# Altium PCB valvePCB.PcbDoc
Units mil, origin at the board's own origin, x right, y up, seen from the top; angles counter-clockwise.
Board outline 3900 x 2800 mil, 4 copper layers (Top Layer, Layer 1, Layer 2, Bottom Layer), stack 23.756 mil thick; 69 components, 43 nets, 241 pads, 132 vias.
Unrouted connection lines stored in the file: 44.
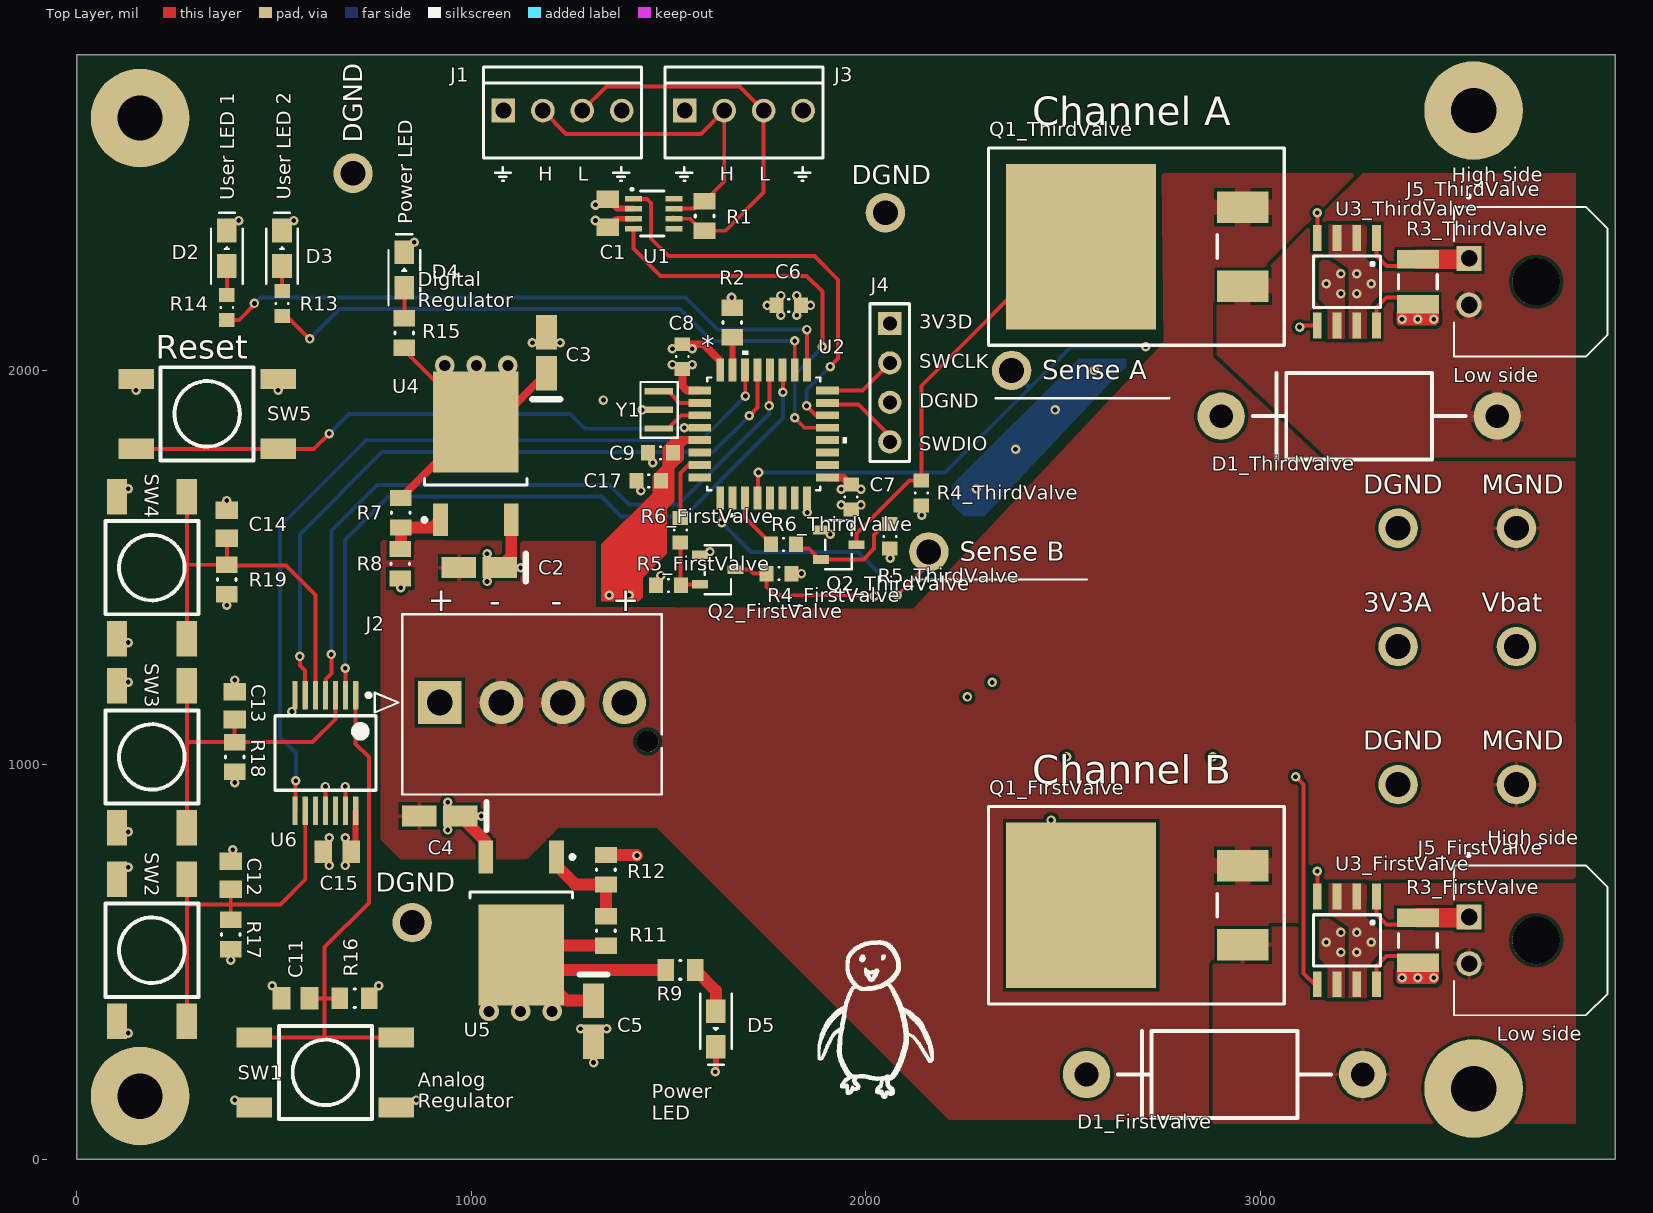
[diagram p0: Top Layer view]
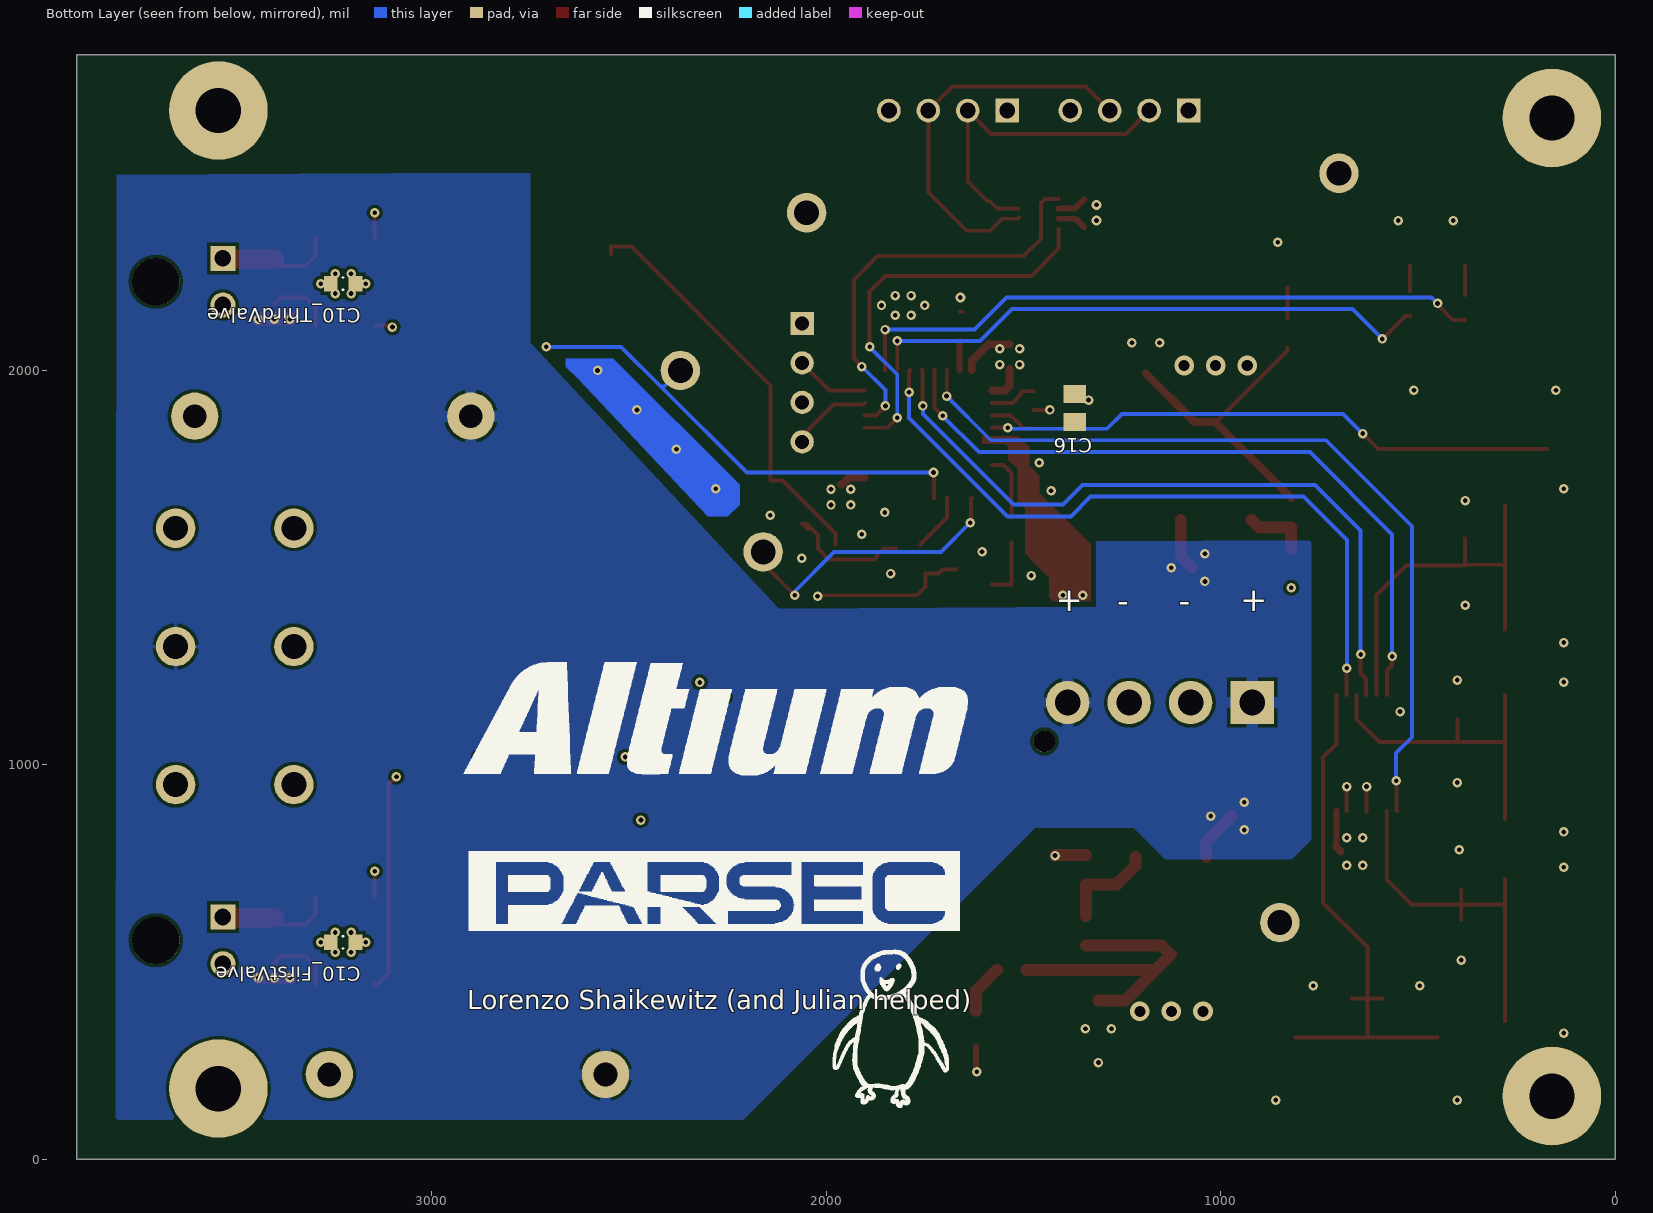
[diagram p1: Bottom Layer view, seen from below]
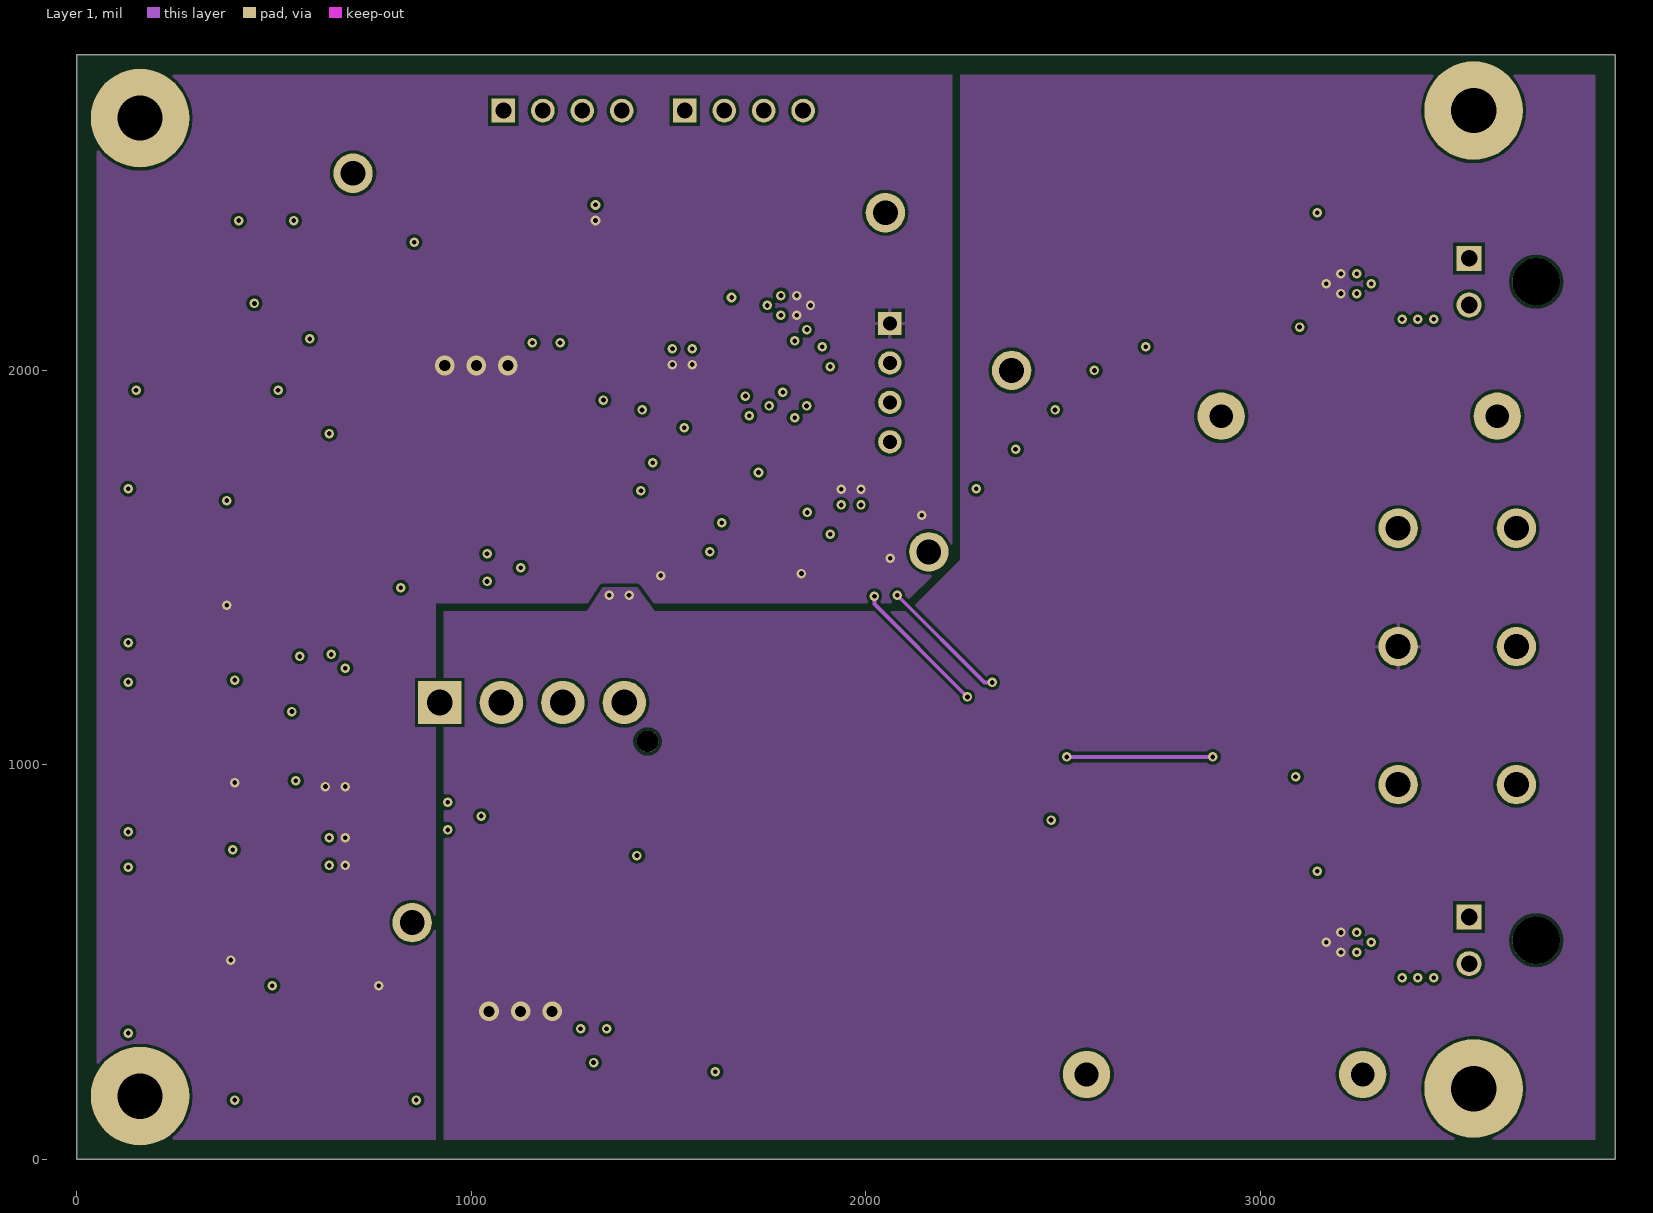
[diagram p2: Layer 1]
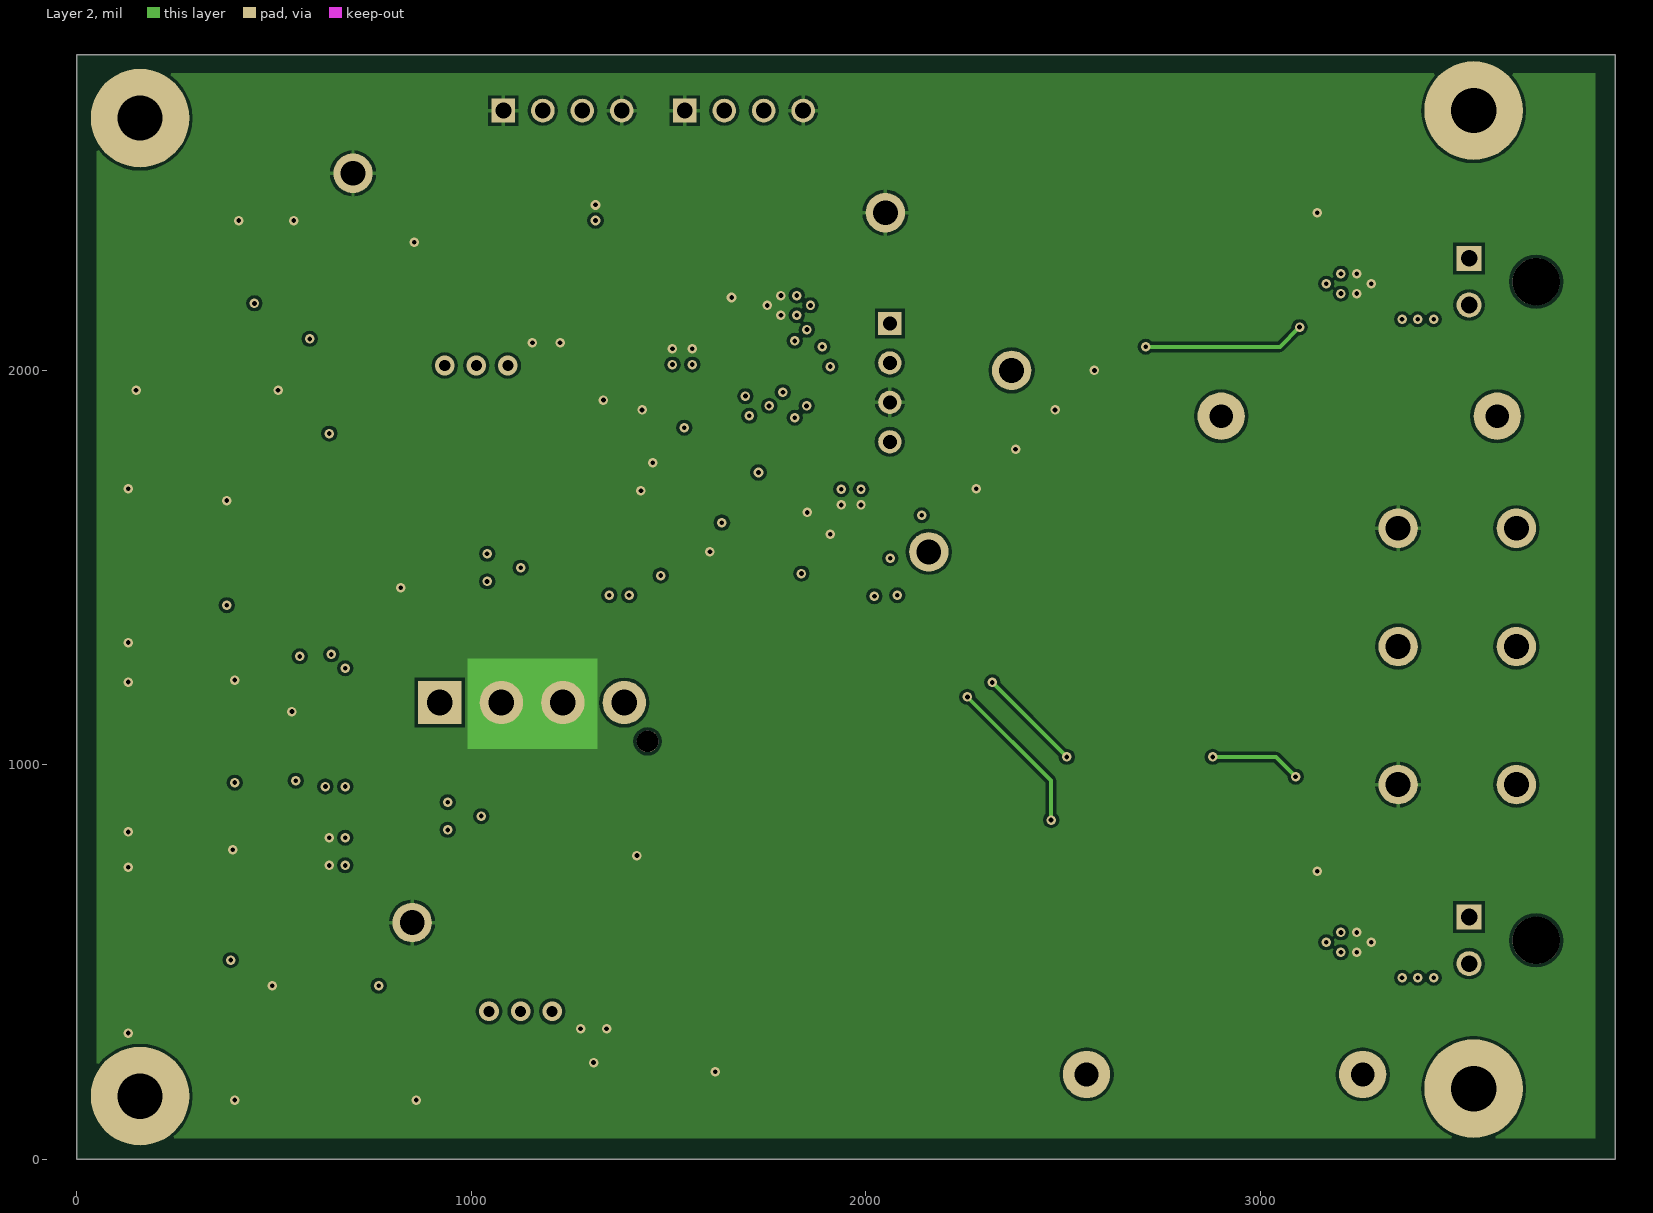
[diagram p3: Layer 2]
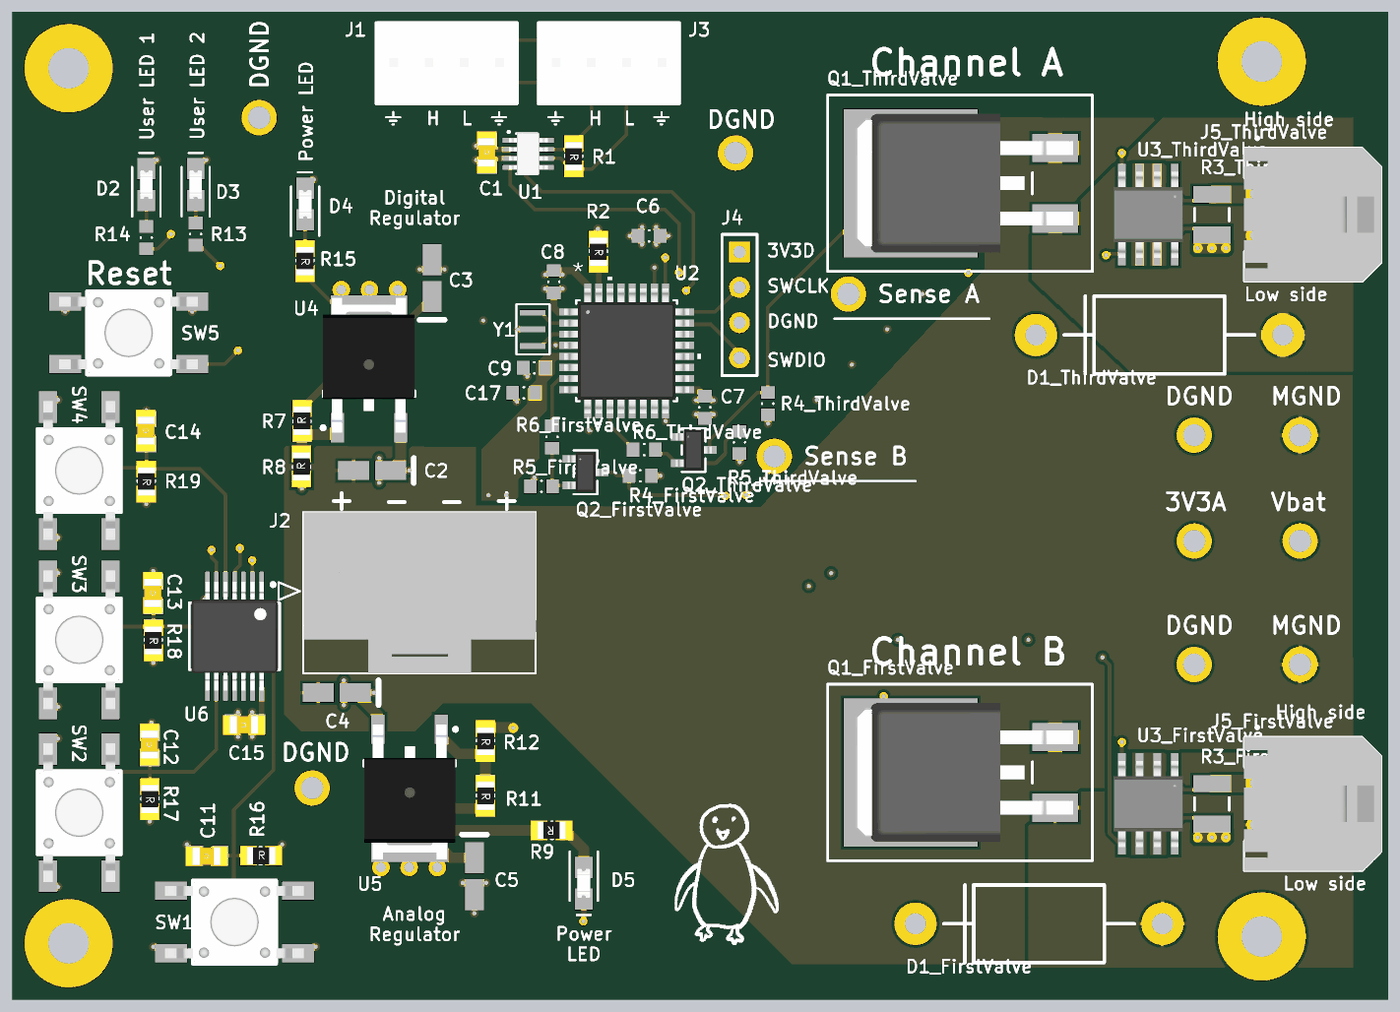
[diagram p4: 3D render of the assembled board from above, using the file's embedded part models]

## Layer stack, top to bottom
Top Solder: solder mask 0.4, Solder Resist, Dk 3.5
Top Layer: signal copper 1.4
Dielectric 2: prepreg 2.8, PP-006, Dk 4.1
Layer 1: signal copper 1.378
Dielectric 1: dielectric 12.6, FR-4, Dk 4.8
Layer 2: signal copper 1.378
Dielectric 3: prepreg 2.8, PP-006, Dk 4.1
Bottom Layer: signal copper 1.4
Bottom Solder: solder mask 0.4, Solder Resist, Dk 3.5

## Board outline
0,0 0,2800 3900,2800 3900,0

## Design rules (kind name [scope] priority, off if disabled: settings)
BoardOutlineClearance [All] p1: gap=8 ignorepadtopadclearanceinfootprint=FALSE
Clearance [All] p1: gap=8 ignorepadtopadclearanceinfootprint=FALSE except(5: SMDPad-SMDPad; 10: Fill-Fill Fill-Poly Fill-Region Poly-Poly Poly-Region Region-Region; 12.99: Arc-Hole Track-Hole)
Clearance "Interior Layer Track" [(OnLayer('Layer 1') OR OnLayer('Layer 2')) AND IsTrack vs (OnLayer('Layer 1') OR OnLayer('Layer 2')) AND IsTrack] p2: gap=5 ignorepadtopadclearanceinfootprint=FALSE
Clearance "Exterior Layer Track" [(OnLayer('Top Layer') OR OnLayer('Bottom Layer')) AND IsTrack vs (OnLayer('Top Layer') OR OnLayer('Bottom Layer')) AND IsTrack] p3: gap=8 ignorepadtopadclearanceinfootprint=FALSE
HoleSize [All] p1: absolutevalues=TRUE maxlimit=248.03 minlimit=7.87 maxpercent=80.000 minpercent=20.000
HoleToHoleClearance HoleToHoleClearance_1 [All] p1: gap=10 allowstackedmicrovias=TRUE
HoleToHoleClearance ViaHoleToVIaHole [IsVia vs IsVia] p2: gap=10 allowstackedmicrovias=TRUE
MinimumSolderMaskSliver [All] p1: minsoldermaskwidth=8
PolygonConnect AGND_Puddle [IsNamedPolygon('AGND_puddle3') OR IsNamedPolygon('3V3A_puddle3') OR IsNamedPolygon('AGND_puddle1') OR IsNamedPolygon('3V3A_puddle1')] p1: connectstyle=Direct reliefconductorwidth=10 reliefentries=4 polygonreliefangle="90 Angle" airgapwidth=10
PolygonConnect BatteryConnect [IsNamedPolygon('High_side_power') OR IsNamedPolygon('Low_side_power') OR IsNamedPolygon('ggg') OR IsNamedPolygon('Collector3') vs InComponent('Q1_FirstValve') OR InComponent('Q1_ThirdValve') OR InComponent('J2') OR InComponent('D1_FirstValve') OR InComponent('D1_ThirdValve') OR InComponent('J5_FirstValve') OR InComponent('J5_ThirdValve')] p2: thpad.connectstyle=Relief thpad.reliefconductorwidth=30 thpad.reliefentries=4 thpad.polygonreliefangle="90 Angle" thpad.airgapwidth=8 smdpad.connectstyle=Relief smdpad.reliefconductorwidth=40 smdpad.reliefentries=4 smdpad.polygonreliefangle="90 Angle" smdpad.airgapwidth=8 via.connectstyle=Direct via.reliefconductorwidth=20 via.reliefentries=4 via.polygonreliefangle="90 Angle" via.airgapwidth=10
PolygonConnect [All] p3: thpad.connectstyle=Relief thpad.reliefconductorwidth=10 thpad.reliefentries=4 thpad.polygonreliefangle="90 Angle" thpad.airgapwidth=8 smdpad.connectstyle=Relief smdpad.reliefconductorwidth=10 smdpad.reliefentries=4 smdpad.polygonreliefangle="90 Angle" smdpad.airgapwidth=8 via.connectstyle=Direct via.reliefconductorwidth=10 via.reliefentries=4 via.polygonreliefangle="90 Angle" via.airgapwidth=10
RoomDefinition valves [InComponentClass('valves')] p1: confinementstyle=ConfineIn formatcopy=TRUE lockcomponents=FALSE outline -2400,-2900 -400,-2900 -400,-1900 -2400,-1900
RoomDefinition Designator [InComponentClass('Designator')] p2: confinementstyle=ConfineIn formatcopy=TRUE lockcomponents=FALSE outline -2400,-2900 -400,-2900 -400,-1900 -2400,-1900
RoomDefinition Buttons [InComponentClass('Buttons')] p3: confinementstyle=ConfineIn formatcopy=TRUE lockcomponents=FALSE outline -2400,-2900 -400,-2900 -400,-1900 -2400,-1900
RoutingVias [All] p1: holewidth=28 width=50 viastyle="Through Hole" minholewidth=7.87 minwidth=17.72 maxholewidth=28 maxwidth=50
SilkToSilkClearance [All] p1: silktosilkclearance=5.91
SilkToSolderMaskClearance [IsPad] p1: minsilkscreentomaskgap=5.91 clearancetoexposedcopper=TRUE
SolderMaskExpansion [All] p1: expansion=2 istentingtop=FALSE
Width [All] p1: maxlimit=100 minlimit=5 preferedwidth=10
25 further rules are at their usual default settings.

## Classes and differential pairs
component class Buttons: C11 C12 C13 C14 C15 R16 R17 R18 R19 SW1 SW2 SW3 SW4 U6
component class FirstValve: C10_FirstValve D1_FirstValve J5_FirstValve Q1_FirstValve Q2_FirstValve R3_FirstValve R4_FirstValve R5_FirstValve R6_FirstValve U3_FirstValve
channel class ValveControl: FirstValve SecondValve ThirdValve
component class valves: C1 C6 C7 C8 C9 C16 C17 D2 D3 J1 J2 J3 J4 R1 R2 R13 R14 SW5 U1 U2 Y1
component class ThirdValve: C10_ThirdValve D1_ThirdValve J5_ThirdValve Q1_ThirdValve Q2_ThirdValve R3_ThirdValve R4_ThirdValve R5_ThirdValve R6_ThirdValve U3_ThirdValve
component class Designator: C2 C3 C4 C5 D4 D5 R7 R8 R9 R11 R12 R15 U4 U5

## Components (designator, comment, footprint, x,y, rotation, side; value= is the part's Value field where it differs from the comment)
C1 "CapCer" C0805_med_density 1346.3,2398.62 r90 top value=100n
C2 "CapTant" C1206_TANT_LOW_DENSITY 1020,1500 r180 top value=1uF
C3 "CapTant" C1206_TANT_LOW_DENSITY 1190,2045 r90 top value=1uF
C4 "CapTant" C1206_TANT_LOW_DENSITY 920,870 r180 top value=1uF
C5 "CapTant" C1206_TANT_LOW_DENSITY 1310,350 r270 top value=1uF
C6 "CapCer" C0603_med_density 1805,2165 r0 top value=4u7
C7 "CapCer" C0603_med_density 1963,1679 r90 top value=100n
C8 "CapCer" C0603_med_density 1535,2035 r270 top value=100n
C9 "CapCer" C0603_med_density 1480,1791 r180 top value=10n
C10_FirstValve "CapCer" C0603_med_density 3225,550 r0 bottom value=0u1 (schematic designator C10)
C10_ThirdValve "CapCer" C0603_med_density 3225,2220 r0 bottom value=0u1 (schematic designator C10)
C11 "CapCer" C0805_med_density 554,408 r180 top value=0.47uF
C12 "CapCer" C0805_med_density 390,720 r90 top value=0.47uF
C13 "CapCer" C0805_med_density 400,1150 r90 top value=0.47uF
C14 "CapCer" C0805_med_density 380,1610 r90 top value=0.47uF
C15 "CapCer" C0805_med_density 660,780 r180 top value=0.1uF
C16 "CapCer" C0805_med_density 1370,1905 r270 bottom value=100n
C17 "CapCer" C0603_med_density 1450,1720 r180 top value=1u
D1_FirstValve "1655-1921-1-ND" DO-201AD 3260,215 r180 top (schematic designator D1)
D1_ThirdValve "1655-1921-1-ND" DO-201AD 3601.3,1884.06 r180 top (schematic designator D1)
D2 "LED" LED0805 520,2310 r90 top value=Red
D3 "LED" LED0805 380,2310 r90 top value=Green
D4 "LED" LED0805 830,2255 r90 top
D5 "LED" LED0805 1620,330 r270 top
J1 "Molex KK 1x4" "Molex KK 4x1" 1281.3,2659.06 r90 top
J2 "Battery" CON_2074781004_MOL 920.09,1158 r180 top
J3 "Molex KK 1x4" "Molex KK 4x1" 1741.3,2659.06 r90 top
J4 "Header 4" HDR1X4 2061.3,2119.06 r270 top
J5_FirstValve "Valve" "MOLEX_436500200 - duplicate" 3686.22,555 r90 top (schematic designator J5)
J5_ThirdValve "Valve" "MOLEX_436500200 - duplicate" 3686.22,2225 r90 top (schematic designator J5)
Q1_FirstValve "2STBN15D100" D2PAK 2751.3,644.06 r90 top (schematic designator Q1)
Q1_ThirdValve "2STBN15D100" D2PAK 2751.3,2314.06 r90 top (schematic designator Q1)
Q2_FirstValve "RK7002BMT116" TRANS_RK7002BMHZG_ROM 1625,1495 r270 top (schematic designator Q2)
Q2_ThirdValve "RK7002BMT116" TRANS_RK7002BMHZG_ROM 1931.3,1558.06 r270 top (schematic designator Q2)
R1 "ResChip" R0805_med_density 1591.3,2391.65 r270 top value=120R
R2 "ResChip" R0805_med_density 1661.3,2121.46 r270 top value=100R
R3_FirstValve "ResChip" R1210_med_density 3400,555 r270 top value=4m (schematic designator R3)
R3_ThirdValve "ResChip" R1210_med_density 3400,2225 r270 top value=4m (schematic designator R3)
R4_FirstValve "ResChip" R0603_med_density 1780,1485 r180 top value=91R (schematic designator R4)
R4_ThirdValve "ResChip" R0603_med_density 2141.3,1689.55 r90 top value=91R (schematic designator R4)
R5_FirstValve "ResChip" R0603_med_density 1500,1455 r0 top value=10k (schematic designator R5)
R5_ThirdValve "ResChip" R0603_med_density 2061.3,1579.55 r90 top value=10k (schematic designator R5)
R6_FirstValve "ResChip" R0603_med_density 1530,1595 r90 top value=100R (schematic designator R6)
R6_ThirdValve "ResChip" R0603_med_density 1791.3,1559.06 r180 top value=100R (schematic designator R6)
R7 "ResChip" R0805_med_density 821.3,1639.06 r90 top value=240R
R8 "ResChip" R0805_med_density 820,1510 r90 top value=412R
R9 "ResChip" R0805_med_density 1530,480 r180 top value=390R
R11 "ResChip" R0805_med_density 1341.3,579.06 r270 top value=240R
R12 "ResChip" R0805_med_density 1341.3,734.06 r270 top value=390R
R13 "ResChip" R0603_med_density 520,2170 r270 top value=1k
R14 "ResChip" R0603_med_density 380,2160 r270 top value=1k
R15 "ResChip" R0805_med_density 830,2095 r270 top value=390R
R16 "ResChip" R0805_med_density 704,408 r0 top value=100k
R17 "ResChip" R0805_med_density 390,570 r270 top value=100k
R18 "ResChip" R0805_med_density 400,1020 r270 top value=100k
R19 "ResChip" R0805_med_density 380,1470 r270 top value=100k
SW1 "Switch" PUSHBUTTON 630,220 r0 top
SW2 "Switch" PUSHBUTTON 190,530 r270 top
SW3 "Switch" PUSHBUTTON 190,1020 r270 top
SW4 "Switch" PUSHBUTTON 190,1500 r270 top
SW5 "Switch" PUSHBUTTON 330,1890 r0 top
U1 "TCAN332DCNT" SOT-23-8 1462.48,2397.44 r270 top
U2 "STM32F042K6T6" LQFP-32 1741.3,1839.06 r0 top
U3_FirstValve "INA240A3D" INA240A3D#1 3220,555 r270 top (schematic designator U3)
U3_ThirdValve "INA240A3D" INA240A3D#2 3220,2225 r270 top (schematic designator U3)
U4 "LM317" D-PAK 1011.3,1788.35 r90 top
U5 "LM317" D-PAK 1126.3,599.06 r270 top
U6 "SN74LVC14ADBR" SOP-14 630,1030 r270 top
Y1 "CSTCE8M00" "8MHz Ceramic Resonator" 1475,1852.76 r90 top

## Footprints (in the part's own frame and the unit in brackets; to place one, negate y for a bottom-side part, rotate by r counter-clockwise, add the part's x,y. Pads: shape width x height; smd on the part's side, far side on the other; paste and mask are expansions set on the pad)
"8MHz Ceramic Resonator" [mil] "8MHz Ceramic Resonator Murata"
  rect 16x72 smd: 1(0,0) 2(47.24,0) 3(94.49,0)
  silkscreen extent -24,-48 118,46
C0603_med_density [mm] "Chip Capacitor, Body 1.6x0.8mm, Height 1.0mm, IPC Medium Density"
  rect 0.9x1 smd: 1(-0.8,0) 2(0.8,0)
  silkscreen extent -0.03,-0.4 0.03,0.4, body extent -0.87,-0.48 0.88,0.47, height 1
C0805_med_density [mm] "Chip Capacitor, Body 2.0x1.2mm, Height 0.75mm, IPC Medium Density"
  rect 1.15x1.45 smd: 1(-0.9,0) 2(0.9,0)
  body extent -1.42,-0.67 1.58,0.73, height 0.93
C1206_TANT_LOW_DENSITY [mm] "Molded TAN Capacitor, 2-Leads, Body 3.4x1.8mm, IPC Low Density"
  rect 2.235x1.35 smd: 1(-1.325,0) 2(1.325,0)
  silkscreen extent -3,-0.9 -3,0.9, body extent -1.7,-0.9 1.7,0.9, height 1.8
CON_2074781004_MOL [mil] "Molex 1x4 11A connector"
  rect 110x110 hole 65 mask+3: 1(0,0)
  round 110 hole 65 mask+3: 2(-155.91,0) 3(-311.81,0) 4(-467.72,0)
  round 55.12 hole 55 unplated mask+3: 5(-526.77,98.43)
  silkscreen extent -563,-224 165,233, body extent -564,-223 94,233, height 558
D2PAK [mil]
  rect 80x130 smd: 1(-100,-205) 3(100,-205)
  rect 420x380 smd: 2(0,205)
  silkscreen extent -250,-310 250,440, body extent -197,-255 197,360, height 200
D-PAK [mm] "D-PAK, 4-Leads, Body 6.1x6.5mm, Pitch 2.28mm, Lead Span 9.7mm, IPC Medium Density"
  rect 2.1x0.95 smd: 1(-4.25,2.28) 3(-4.25,-2.28)
  rect 6.5x5.5 smd: 4(2.05,0)
  silkscreen extent -4.37,-3.3 -1.6,3.43, body extent -4.6,-3.28 5.1,3.3, height 2.3
DO-201AD [mil]
  round 120 hole 60: 1(0,0) 2(700,0)
  silkscreen extent 80,-110 620,110
HDR1X4 [mm] "Connector; Header; 4 Position"
  rect 1.5x1.5 hole 0.9: 1(0,0)
  round 1.5 hole 0.9: 2(2.54,0) 3(5.08,0) 4(7.62,0)
  silkscreen extent -1.27,-1.27 8.89,1.27
INA240A3D#1 [mil] "Footprint for TI current sense op amp"
  rect 65.5x22 smd paste+0 mask+0: 1(-111.25,75) 2(-111.25,25) 3(-111.25,-25) 4(-111.25,-75) 5(111.25,-75) 6(111.25,-25) 7(111.25,25) 8(111.25,75)
  silkscreen extent -65,-85 65,85, body extent -122,-99 122,99, height 69
INA240A3D#2 [mil] "Footprint for TI current sense op amp"
  rect 65.5x22 smd paste+0: 1(-111.25,75) 2(-111.25,25) 3(-111.25,-25) 4(-111.25,-75) 5(111.25,-75) 6(111.25,-25) 7(111.25,25) 8(111.25,75)
  silkscreen extent -65,-85 65,85, body extent -122,-99 122,99, height 69
LED0805 [mil] "0805 LED"
  rect 60x50 smd: A(-45,0) K(45,0)
  silkscreen extent -90,-40 90,40, body extent -41,-18 41,18, height 33
LQFP-32 [mil]
  rect 58x20 smd paste+0 mask+0: 1(-162,110.24) 2(-162,78.74) 3(-162,47.24) 4(-162,15.75) 5(-162,-15.75) 6(-162,-47.24) 7(-162,-78.74) 8(-162,-110.24) 17(162,-110.24) 18(162,-78.74) 19(162,-47.24) 20(162,-15.75) 21(162,15.75) 22(162,47.24) 23(162,78.74) 24(162,110.24)
  rect 20x58 smd paste+0 mask+0: 9(-110.24,-162) 10(-78.74,-162) 11(-47.24,-162) 12(-15.75,-162) 13(15.75,-162) 14(47.24,-162) 15(78.74,-162) 16(110.24,-162) 25(110.24,162) 26(78.74,162) 27(47.24,162) 28(15.75,162) 29(-15.75,162) 30(-47.24,162) 31(-78.74,162) 32(-110.24,162)
  silkscreen extent -143,-211 211,211, body extent -177,-177 177,177, height 64
"Molex KK 4x1" [mil]
  rect 60x60 hole 40: 1(0,200)
  round 60 hole 40: 2(0,100) 3(0,0) 4(0,-100)
  silkscreen extent -120,-150 110,250, body extent -120,-150 110,250, height 458
"MOLEX_436500200 - duplicate" [mm]
  rect 1.605x1.605 hole 1.07: 1(1.5,3.97)
  round 1.605 hole 1.07: 2(-1.5,3.97)
  round 3.05 hole 3.05 unplated: ""(0,-0.35)
  silkscreen extent -4.82,-4.95 5.6,4.95, body extent -4.82,-4.95 4.83,4.95, height 5.58
PUSHBUTTON [mil]
  rect 90x51.18 smd: 1(-180,88.58) 1(180,88.58) 2(-180,-88.58) 2(180,-88.58)
  silkscreen extent -118,-118 118,118, body extent -197,-118 197,118, height 202
R0603_med_density [mm] "Chip Resistor, Body 1.6x0.8mm, IPC Medium Density"
  rect 0.9x1 smd: 1(-0.8,0) 2(0.8,0)
  silkscreen extent -0.02,-0.4 0.02,0.4, body extent -0.85,-0.47 0.85,0.47, height 0.6
R0805_med_density [mm] "Chip Resistor, Body 2.0x1.3mm, IPC Medium Density"
  rect 1.05x1.4 smd: 1(-0.95,0) 2(0.95,0)
  silkscreen extent -0.05,-0.6 0.05,0.6, body extent -1.46,-0.7 1.54,0.7, height 0.53
R1210_med_density [mm] "Chip Resistor, 2-Leads, Body 3.20x2.50mm, IPC Medium Density"
  rect 1.2x2.7 smd: 1(-1.45,0) 2(1.45,0)
  silkscreen extent -0.45,-1.25 0.45,1.25, body extent -1.7,-1.35 1.7,1.35, height 0.6
SOP-14 [mm] "SOP, 14-Leads, Body 5.6x6.5mm, Pitch 0.65mm, IPC Low Density"
  rrect22% 1.85x0.33 smd: 1(-3.725,1.95) 2(-3.725,1.3) 3(-3.725,0.65) 4(-3.725,0) 5(-3.725,-0.65) 6(-3.725,-1.3) 7(-3.725,-1.95) 8(3.725,-1.95) 9(3.725,-1.3) 10(3.725,-0.65) 11(3.725,0) 12(3.725,0.65) 13(3.725,1.3) 14(3.725,1.95)
  silkscreen extent -3.85,-3.25 2.4,3.25, body extent -3.91,-3.1 3.91,3.1, height 2
SOT-23-8 [mm] "SOT-23-8"
  rect 0.344x1.1 smd: 1(-0.975,-1.3) 2(-0.325,-1.3) 3(0.325,-1.3) 4(0.975,-1.3) 5(0.975,1.3) 6(0.325,1.3) 7(-0.325,1.3) 8(-0.975,1.3)
  silkscreen extent -1.65,-1.48 1.44,0.65, body extent -1.5,-1.4 1.5,1.4, height 1.11
TRANS_RK7002BMHZG_ROM [mil]
  rect 22x40 smd paste+0 mask+0: 1(-37.4,-45) 2(37.4,-45) 3(0,45)
  silkscreen extent -62,-34 62,34, body extent -57,-51 57,51, height 48

## Part data
C1 C6 C7 C8 C9 C10_FirstValve C10_ThirdValve C11 C12 C13 C14 C15 C16 C17: "SMD Ceramic Capacitor"
C2 C3 C4 C5: "Through-hole tantalum capacitor", Package="THD, 100mil pitch, 4.5mm diameter", Rating=10V
D1_FirstValve D1_ThirdValve: library part DiodeSchottky, "Schottky Diode", PartNumber=1655-1921-1-ND
D2 D3 D4 D5: "Light-emitting diode"
J1 J3: "1x4 Molex KK Connector (CAN)"
J2: library part 2074781004, "Molex 1x4 11A Connector", Built_By=Molex_Team, Copyright="Copyright (C) 2018 Accelerated Designs. All rights reserved", Manufacturer_Part_Number=2074781004, RefDes=RefDes, SourceLibrary=Molex_2020-09-09, Type=DEV, Vendor="Molex Connector Corporation"
J4: "Header, 4-Pin", LatestRevisionDate=17-Jul-2002, LatestRevisionNote="Re-released for DXP Platform.", Publisher="Altium Limited"
J5_FirstValve J5_ThirdValve: library part "General Molex"
Q1_FirstValve Q1_ThirdValve: library part BJT, "2STBN15D100 BJT", Supplier Part Number 1=497-10113-1-ND, DC Gain=750, Part Number=2STBN15D100, Supplier 1=Digi-Key
Q2_FirstValve Q2_ThirdValve: "n-channel MOSEFT", Built_By=EMA_Matt, Copyright="Copyright (C) 2018 Accelerated Designs. All rights reserved", Manufacturer_Part_Number=RK7002BMT116, RefDes=RefDes, SourceLibrary=Rohm_2019-09-23, Type=DEV, Vendor="ROHM Semiconductor"
R1 R2 R3_FirstValve R3_ThirdValve R7 R8 R9 R11 R12 R13 R14 R15 R16 R17 R18 R19: "SMD Chip resistor"
R4_FirstValve R4_ThirdValve: "SMD Chip resistor", Rating="0.25 W"
R5_FirstValve R5_ThirdValve R6_FirstValve R6_ThirdValve: "SMD Chip resistor", Rating="0.125 W"
SW1 SW2 SW3 SW4 SW5: "Push button switch, momentary, normally open"
U1: "IC TXRX CAN 3.3V SOT23-8"
U2: "STM32 MCU", Built_By=EMA_UL_Team, Copyright="Copyright (C) 2018 Accelerated Designs. All rights reserved", Manufacturer_Part_Number=STM32F042K6T6, RefDes=RefDes, SourceLibrary=Updates_to_database_2020-10-19, Type=DEV, Vendor=STMicroelectronics
U3_FirstValve U3_ThirdValve: "SchLib for TI op amp for current sensing.", Supplier Part Number 1=296-48839-ND, Supplier 1=Digi-Key
U4 U5: "Linear Voltage Regulator"
U6: library part SN74LVC14, "Hex Schmitt-Trigger Inverter, DB0014A, LARGE T&R", F @ Nom Voltage(Max)(Mhz)=100, Generic Part Number=SN74LVC14A, ICC @ Nom Voltage(Max)(mA)=0.01, Manufacturer="Texas Instruments", Operating Temperature Range(C)="-40 to 125", Rating=Catalog, tpd @ Nom Voltage(Max)(ns)=11,7.8,7.5,6.4, Voltage(Nom)(V)=1.8,2.5,2.7,3.3, Bits(#)=6, Code_JEDEC=MO-150, DatasheetVersion=SCAS285AA, Input Type=CMOS,TTL, Output Drive (IOL/IOH)(Max)(mA)=-24/24, Output Type=CMOS, PackageReference=DB0014A, Schmitt Trigger=Yes, Technology Family=LVC, VCC(Max)(V)=3.6, VCC(Min)(V)=2
Y1: "8MHz Ceramic Resonator"

## Free pads (board coordinates)
  round 100 hole 63: 1(700,2500) 1(850,600) 1(2050,2400) 1(3350,1600) 1(3650,1600) 2(3350,950) 2(3650,950) 3(2160,1540) 3(2370,2000) 3(3350,1300) 3(3650,1300)
  round 250 hole 115: MH1(3541.3,2659.06) MH2(160,2640) MH3(160,160) MH4(3541.3,179.06)

## Via types
v1: diameter 24, hole 12, Top Layer to Bottom Layer, tented both sides, 89 vias
v2: diameter 24, hole 12, Top Layer to Bottom Layer, 27 vias
v3: diameter 50, hole 28, Top Layer to Bottom Layer, 6 vias
v4: diameter 25, hole 12, Top Layer to Bottom Layer, tented both sides, 5 vias
v5: diameter 24, hole 12, Top Layer to Bottom Layer, tented top, 5 vias

## Nets (pads, with @x,y where several pads share a name; then routed paths per layer and width w, separated by ;. In a path a pad name is that pad's centre, name@x,y a point inside that pad or via, vN(x,y) a via of type N, cw(c..) or ccw(c..) an arc to the next point about the centre after c; other vN are vias at no path point)
3V3A: C5.1 C9.1 C10_FirstValve.1 C10_ThirdValve.1 C17.1 pad.3@3350,1300 R9.2 R11.2 U2.5 U3_FirstValve.6 U3_ThirdValve.6 U5.4 | length 784.4
  Top Layer w30: C5.1 1242.48,402.17 U5.4@1164.65,480 ; R11.2 1149.61,541.65 U5.4 U5.4@1164.65,480 ; R9.2 U5.4@1164.65,480
  other v1: 3205,525 3168,550 3205,575 1350,1430 1400,1430 3205,2195 3168,2220 3205,2245
  other v3: 1045,375 1125,375 1205,375
3V3D: C1.1 C3.1 C6.2 C7.2 C8.2 C15.1 J4.1 R4_FirstValve.1 R4_ThirdValve.1 R5_FirstValve.1 R5_ThirdValve.1 R7.2 R15.2 R16.2 R17.2 R18.2 R19.2 U1.3 U2.1 U2.17 U4.4 U6.11 U6.13 U6.14 | length 1229.6
  Top Layer w10: U6.11 v2(630,945) ; v2(680,945) 681.18,943.82 U6.13 ; R15.2 830,2050.35 U4.4
  Top Layer w15: C15.1@706.77,791.34 U6.14 ; C1.1 1367.76,2384.65 U1.3
  Top Layer w20: C15.1 C15.1@706.77,791.34 ; R7.2 1011.3,1866.46 U4.4 1066.22,1869.06 C3.1 ; C8.2 1535,1961.01 1546.72,1949.29 U2.1 ; U2.17 1942.71,1728.82 1961.03,1710.5 C7.2
  other v1: 765,440 390,505 680,745 680,815 400,955 380,1405 1480,1480 1837,1485 2062,1524 2142,1633 1938,1699 1988,1699 1510,2015 1560,2015 1825,2140 1860,2165 1825,2190
  other v3: 932.6,2012.4 1012.6,2012.4 1092.6,2012.4
  other v4: 1315,2380
AMP_IN+_FirstValve: C2.1 C4.1 D1_FirstValve.2 D1_ThirdValve.2 J2.1 J2.4 pad.3@3650,1300 R3_FirstValve.2 R3_ThirdValve.2 U3_FirstValve.8 U3_ThirdValve.8 U4.3 U5.3 | length 600.6
  Top Layer w10: U3_FirstValve.8 3295,490 3320,515 3382.91,515 R3_FirstValve.2 ; U3_ThirdValve.8 3295,2160 3320,2185 3382.91,2185 R3_ThirdValve.2
  Top Layer w30: C4.1 1036.54,805.63 U5.3 ; C2.1 1101.06,1528.9 U4.3
  other v1: 940,835 1025,870 940,905 1040,1465 1125,1500 1040,1535
  other v2: 3360,460 3400,460 3440,460 3360,2130 3400,2130 3440,2130
AMP_IN-_FirstValve: J5_FirstValve.1 R3_FirstValve.1 U3_FirstValve.1 | length 299.4
  Top Layer w10: U3_FirstValve.1 3295,620 3320,595 3382.91,595 R3_FirstValve.1
  Top Layer w50: R3_FirstValve.1 J5_FirstValve.1@3524.76,612.09
  Top Layer w60: J5_FirstValve.1@3524.76,612.09 3525.14,612.46 3528.33,612.46 J5_FirstValve.1
AMP_IN-_ThirdValve: J5_ThirdValve.1 R3_ThirdValve.1 U3_ThirdValve.1 | length 299.4
  Top Layer w10: U3_ThirdValve.1 3295,2290 3320,2265 3382.91,2265 R3_ThirdValve.1
  Top Layer w50: R3_ThirdValve.1 J5_ThirdValve.1@3524.76,2282.09
  Top Layer w60: J5_ThirdValve.1@3524.76,2282.09 3525.14,2282.46 3528.33,2282.46 J5_ThirdValve.1
"Button A": U2.27 U6.2 | length 1796.8
  Top Layer w10: v2(680,1245) 680.59,1244.41 680.59,1177.24 U6.2 ; U2.27 1786.77,1999.28 1790,1996.06 v1(1790,1945)
  Bottom Layer w10: v2(680,1245) 680,1570 790,1680 1330,1680 1380,1630 1540,1630 1790,1880 v1(1790,1945)
"Button B": U2.28 U6.4 | length 1809.5
  Top Layer w10: U6.4 631.73,1178.39 631.73,1218.14 645,1231.41 v2(645,1280) ; v1(1755,1910) 1756.02,1911.02 1756.02,2000.03 U2.28
  Bottom Layer w10: v2(645,1280) 645,1594 761,1710 1350,1710 1400,1660 1525,1660 1755,1890 v1(1755,1910)
"Button C": U2.29 U6.6 | length 1802.3
  Top Layer w10: v2(565,1275) 565,1252.44 578.16,1239.28 578.16,1177.31 U6.6 ; v1(1705,1885) 1725.55,1905.55 U2.29
  Bottom Layer w10: v2(565,1275) 565,1584 774,1793 1613,1793 v1(1705,1885)
"Button D": U2.30 U6.8 | length 2122.1
  Top Layer w10: U6.8 554.11,884.23 554.11,959.11 v2(555,960) ; U2.30 1694.53,2000.58 1694.53,1935.47 v1(1695,1935)
  Bottom Layer w10: v2(555,960) 555,1030 515,1070 515,1605 733,1823 1583,1823 v1(1695,1935)
CAN_RX: U1.4 U2.21 | length 1016.8
  Top Layer w10: U1.4 1411.3,2308.7 1480,2240 1850,2240 1890,2200 v2(1890,2060) ; v1(1820,1880) 1845.2,1854.8 U2.21
  Bottom Layer w10: v1(1820,1880) 1820,1990 v2(1890,2060)
CAN_TX: U1.1 U2.22 | length 1072.9
  Top Layer w10: U1.1 1412.13,2435 1445,2435 1455,2425 1455,2335 1500,2290 1870,2290 1930,2230 1930,2030 v2(1910,2010) ; v1(1850,1910) 1873.7,1886.3 U2.22
  Bottom Layer w10: v1(1850,1910) 1850,1950 v2(1910,2010)
CANH: J1.2 J3.2 R1.1 U1.7 | length 845.1
  Top Layer w10: J1.2 1240.35,2600 1582.24,2600 J3.2 1641.3,2479.06 R1.1 1584.41,2429.06 1565.59,2410.24 U1.7
CANL: J1.3 J3.3 R1.2 U1.6 | length 1002.5
  Top Layer w10: J1.3 1342.24,2720 1680.35,2720 J3.3 1741.3,2451.3 1644.25,2354.25 R1.2 1584.41,2354.25 1554.02,2384.65 U1.6 U1.6@1510.94,2387.36
DGND: C1.2 C3.2 C5.2 C6.1 C7.1 C8.1 C9.2 C10_FirstValve.2 C10_ThirdValve.2 C11.2 C12.2 C13.2 C14.2 C15.2 C16.1 C17.2 D2.K D3.K D4.K D5.K J1.1 J1.4 J3.1 J3.4 J4.3 pad.1@700,2500 pad.1@850,600 pad.1@2050,2400 pad.1@3350,1600 pad.2@3350,950 Q2_FirstValve.1 Q2_ThirdValve.1 R2.1 R8.1 R12.1 SW1.2 SW2.2 SW3.2 SW4.2 SW5.1 U1.2 U2.16 U2.32 U3_FirstValve.2 U3_FirstValve.3 U3_FirstValve.4 U3_FirstValve.7 U3_ThirdValve.2 U3_ThirdValve.3 U3_ThirdValve.4 U3_ThirdValve.7 U6.7 Y1.2 | length 532.5
  Top Layer w10: v1(1432.99,1899.99) Y1.2 ; R2.1@1654.41,2148.86 1661.3,2148.86 R2.1@1660,2150.16 ; U3_FirstValve.4 v2(3145,730) ; U3_ThirdValve.4 v2(3145,2400)
  Top Layer w15: C1.2 1370.12,2410.24 U1.2 ; v2(1618.75,221.99) 1620,223.24 D5.K
  Top Layer w20: C8.1 1588.5,2066.5 1631.06,2023.94 U2.32
  Top Layer w30: R12.1 1418.54,771.46 v2(1420,770)
  other v1: 400,150 860,150 1310,245 130,320 1277,331 1343,331 495,440 3245,525 3282,550 3245,575 130,740 640,745 395,785 640,815 130,830 545,1135 130,1210 400,1215 130,1310 821,1449 1605,1540 1910,1585 1852,1640 1938,1659 1988,1659 380,1670 1430,1695 130,1700 2280,1700 1460,1766 2380,1800 2480,1900 1335,1925 150,1950 510,1950 2580,2000 1510,2055 1560,2055 1155,2070 1225,2070 1785,2140 1750,2165 1785,2190 3245,2195 3282,2220 3245,2245 855,2325 410,2380 550,2380
  other v4: 1660,2185 1315,2420
MGND: C2.2 C4.2 J2.2 J2.3 pad.1@3650,1600 pad.2@3650,950 Q1_FirstValve.3 Q1_ThirdValve.3
NetC11_1: C11.1 R16.1 SW1.1 U6.1 | length 1366.2
  Top Layer w10: SW1.1@450,308.58 630,308.58 ; C11.1 628.02,408 ; R16.1 628.02,408 ; U6.1 706.77,1053.23 740,1020 740,650 628.02,538.02 628.02,408 ; SW1.1@810,308.58 630,308.58 ; 628.02,408 628.02,310.57 630,308.58
NetC12_1: C12.1 R17.1 SW2.1 U6.9 | length 940.4
  Top Layer w10: SW2.1@278.58,350 278.58,640 ; SW2.1@278.58,710 278.58,640 ; R17.1 390,645.98 ; C12.1 390,645.98 ; U6.9 578.82,708.82 515.98,645.98 390,645.98 ; 278.58,640 284.57,645.98 390,645.98
NetC13_1: C13.1 R18.1 SW3.1 U6.3 | length 835.3
  Top Layer w10: SW3.1@278.58,862.52 278.58,1005 SW3.1@278.58,1177.48 ; 278.58,1055 280.98,1057.4 R18.1 ; C13.1 R18.1 ; U6.3 655.59,1115.59 597.4,1057.4 R18.1
NetC14_1: C14.1 R19.1 SW4.1 U6.5 | length 994.8
  Top Layer w10: SW4.1@278.58,1342.52 278.58,1510 ; SW4.1@278.58,1657.48 278.58,1510 ; C14.1 R19.1 ; U6.5 604.41,1430.59 530,1505 382.4,1505 R19.1 ; 278.58,1510 281.18,1507.4 R19.1
NetC16_2: C16.2 SW5.2 U2.4 | length 1460.4
  Top Layer w10: SW5.2@172.52,1801.42 487.48,1801.42 601.42,1801.42 v2(640,1840) ; v1(1540,1855) 1540.1,1854.9 1579.2,1854.9 U2.4
  Bottom Layer w10: v2(640,1840) 690,1890 1250,1890 1287.8,1852.2 1533.42,1852.2 1536.21,1855 v1(1540,1855)
NetD1_FirstValve_1: D1_FirstValve.1 J5_FirstValve.2 Q1_FirstValve.1
NetD1_ThirdValve_1: D1_ThirdValve.1 J5_ThirdValve.2 Q1_ThirdValve.1
NetD2_A: D2.A R13.1 | length 63.5
  Top Layer w10: R13.1 D2.A
NetD3_A: D3.A R14.1 | length 73.5
  Top Layer w10: R14.1 D3.A
NetD4_A: D4.A R15.1 | length 77.6
  Top Layer w10: R15.1 D4.A
NetD5_A: D5.A R9.1 | length 126.8
  Top Layer w30: R9.1 1620,427.4 D5.A
NetQ1_FirstValve_2: Q1_FirstValve.2 Q2_FirstValve.3 R4_FirstValve.2 | length 1172.9
  Top Layer w10: Q2_FirstValve.3 1705,1495 1715,1485 R4_FirstValve.2 1748.5,1451.5 1770,1430 2019.78,1430 v2(2022.03,1427.75) ; Q1_FirstValve.2@2546.3,624.06 Q1_FirstValve.2
  Layer 1 w10: v2(2022.03,1427.75) 2022.03,1407.75 2249.78,1180 2257.58,1172.2 v5(2257.8,1172.2)
  Layer 2 w10: v5(2257.8,1172.2) 2270,1160 2470,960 v2(2470,860)
NetQ1_ThirdValve_2: Q1_ThirdValve.2 Q2_ThirdValve.3 R4_ThirdValve.2 | length 1060.4
  Top Layer w10: Q2_ThirdValve.3 1976.3,1586.3 2111.05,1721.05 R4_ThirdValve.2 2141.3,1961.3 2494.06,2314.06 Q1_ThirdValve.2 Q1_ThirdValve.2@2546.3,2294.06
NetQ2_FirstValve_2: Q2_FirstValve.2 R5_FirstValve.2 R6_FirstValve.1 | length 157.5
  Top Layer w10: R6_FirstValve.1 1530,1456.5 1531.1,1457.6 Q2_FirstValve.2
NetQ2_ThirdValve_2: Q2_ThirdValve.2 R5_ThirdValve.2 R6_ThirdValve.1 | length 329
  Top Layer w10: R6_ThirdValve.1@1822.8,1548.06 1855.51,1548.06 1871.3,1532.27 1871.3,1526.65 1877.3,1520.65 Q2_ThirdValve.2 1993.9,1520.65 2021.3,1548.06 2021.3,1583.02 2049.33,1611.05 R5_ThirdValve.2@2059.33,1611.05 ; R5_ThirdValve.2@2046.61,1598.33 R5_ThirdValve.2@2059.33,1611.05 ; R5_ThirdValve.2 R5_ThirdValve.2@2059.33,1611.05
NetR2_2: R2.2 U2.31 | length 73.5
  Top Layer w15: R2.2@1661.3,2074.06 1662.56,2072.8 U2.31
NetR7_1: R7.1 R8.2 U4.1 | length 163
  Top Layer w30: R8.2 821.3,1548.7 R7.1 902.17,1601.65 U4.1
NetR11_1: R11.1 R12.2 U5.1 | length 247.6
  Top Layer w30: U5.1 1216.06,743.74 1263.15,696.65 R12.2 R11.1
NetR13_2: R13.2 U2.26 | length 1463.2
  Top Layer w10: R13.2 531.5,2138.5 v2(590,2080) ; U2.26 v1(1820,2075)
  Bottom Layer w10: v2(590,2080) 666,2156 1529,2156 1610,2075 v1(1820,2075)
NetR14_2: R14.2 U2.25 | length 1632.6
  Top Layer w10: R14.2 411.5,2128.5 450,2167.01 v2(450,2170) ; v2(1850.94,2103.68) 1851.24,2103.38 1851.24,2001.35 U2.25
  Bottom Layer w10: v2(450,2170) 465,2185 1543,2185 1624.32,2103.68 v2(1850.94,2103.68)
NetU2_2: U2.2 Y1.3 | length 119
  Top Layer w10: Y1.3 1503,1947.24 1506,1944.24 1506,1940 1528.2,1917.8 U2.2
NetU2_3: U2.3 Y1.1 | length 120.7
  Top Layer w10: Y1.1 1503,1852.76 1506,1855.76 1506,1860 1532.3,1886.3 U2.3
SWCLK: J4.2 U2.24 | length 186.9
  Top Layer w10: U2.24 1991.54,1949.29 J4.2
SWDIO: J4.4 U2.23 | length 207.7
  Top Layer w10: U2.23 1907.04,1914.06 1981.3,1914.06 2047.31,1848.04 2047.31,1846.32 2061.3,1832.33 J4.4
Val1_PWM: R6_FirstValve.2 U2.7 | length 171.2
  Top Layer w10: R6_FirstValve.2 1530,1740 1550.32,1760.31 U2.7
Val1_Sense: pad.3@2160,1540 U2.9 U3_FirstValve.5 | length 2492
  Top Layer w10: U2.9 1633.03,1675.09 1633.03,1615.97 v4(1635,1614) ; v2(2080,1430) 2160,1510 pad.3@2160,1540 ; v5(3090,970) 3110,950 3110,471.25 3141.25,440 U3_FirstValve.5
  Layer 1 w10: v2(2080,1430) 2301,1209 v5(2321,1209) ; v5(2510,1020) v5(2880,1020)
  Layer 2 w10: v5(2321,1209) v5(2510,1020) ; v5(2880,1020) 3040,1020 v5(3090,970)
  Bottom Layer w10: v4(1635,1614) 1709,1540 1980,1540 2080,1440 v2(2080,1430)
Val3_PWM: R6_ThirdValve.2 U2.11 | length 145.2
  Top Layer w10: U2.11 1694.06,1626.77 1759.8,1561.02 R6_ThirdValve.2
Val3_Sense: pad.3@2370,2000 U2.12 U3_ThirdValve.5 | length 1702.8
  Top Layer w10: U2.12 1726.9,1678.4 1726.9,1739.65 v4(1728.24,1741) ; v2(3100,2110) 3103.75,2113.75 U3_ThirdValve.5
  Layer 2 w10: v2(2710,2060) 3050,2060 v2(3100,2110)
  Bottom Layer w10: v4(1728.24,1741) 2201,1741 2420,1960 ; pad.3@2370,2000 2410,1960 2420,1960 ; v2(2710,2060) 2520,2060 2420,1960
pads on no net: J2.5 J5_FirstValve. J5_ThirdValve. U1.5 U1.8 U2.6 U2.8 U2.10 U2.13 U2.14 U2.15 U2.18 U2.19 U2.20 U6.10 U6.12

## Polygon pours and split planes (outlines as drawn)
NetD1_ThirdValve_1 on Top Layer "Collector3" (solid, remove dead copper, pour order 34): 3800,2500 3800,1780 3168.57,1780 2890,2040 2890,2260 3020,2260 3260,2500
NetD1_FirstValve_1 on Top Layer "Collector1" (solid, remove dead copper, pour order 35): 3800,700 3800,90 3390,90 2880,90 2880,590 3128.75,590 3238.75,700
MGND on Top Layer "Low_side_power" (solid, remove dead copper, pour order 36): 770,1570 770,810 820,760 1140,760 1220,840 1470,840 2210,100 3801.42,100 3797.41,2497.81 2751.05,2501.35 2756.07,2071.42 2120,1395.97 1315,1400.74 1315,1566.46
3V3A on Top Layer "3V3A_puddle1" (solid, remove dead copper, pour order 33): 3150,610 3150,510 3172,488 3172,410 3215,410 3215,585 3179,609
DGND on Top Layer "AGND_puddle1" (solid, remove dead copper, pour order 31): 3270,410 3270,485 3300.15,519.31 3299.92,584.45 3269.71,613.01 3270,700 3174,700 3174,622.33 3225,588.33 3225,410
3V3A on Top Layer "3V3A_puddle3" (solid, remove dead copper, pour order 32): 3150,2280 3150,2180 3172,2158 3172,2080 3215,2080 3215,2255 3179,2279
DGND on Top Layer "AGND_puddle3" (solid, pour order 30): 3270,2080 3270,2155 3300.15,2189.31 3299.92,2254.45 3269.71,2283.01 3270,2370 3174,2370 3174,2292.33 3225,2258.33 3225,2080
3V3D on Layer 1 "3V3D" (solid, remove dead copper, pour order 41): 910,50 910,1410 2100,1410 2220,1530 2220,2750 50,2750 50,50
3V3A on Layer 1 "3V3A" (solid, remove dead copper, pour order 39): 930,50 3850,50 3850,2750 2240,2750 2240,1520 2110,1390 1464.93,1390 1420.13,1450 1333.2,1450 1293.71,1390.17 930,1390
AMP_IN+_FirstValve on Bottom Layer "High_side_power" (solid, remove dead copper, pour order 38): 770,1570 770,810 820,760 1140,760 1220,840 1470,840 2210,100 3801.09,100 3799,2496.27 3106.22,2500 2750.37,2500 2750.37,2070 2120,1395.97 1315,1400.74 1315,1566.46
DGND on Layer 2 "DGND_plane" (solid, remove dead copper, pour order 42): 49.86,53.31 3849.86,53.31 3849.86,2753.31 49.86,2753.31

## Other copper
Top Layer:
  region net 3V3A: 1330,1415 1330,1559 1460,1689 1460,1733 1485,1758 1485,1805 1513,1833 1605,1833 1605,1814 1546,1814 1538,1806 1538,1774 1515,1751 1515,1669 1495,1649 1495,1535 1435,1475 1435,1425 1425,1415
  region net AMP_IN+_FirstValve: 3347,478 3347,450 3352,445 3446,445 3453,452 3453,478
  region net AMP_IN+_FirstValve: 3347,2148 3347,2120 3352,2115 3446,2115 3453,2122 3453,2148
Layer 2:
  rectangle net DGND: 990,1040 1320,1270
Bottom Layer:
  region net DGND: 2540,2030 2220,1710 2220,1660 2250,1630 2300,1630 2630,1980 2660,2010 2660,2030

## Silkscreen, mask and mechanical layers (free items; w line width, h text height)
Top Overlay:
  drawing of 1350 lines, arcs and shapes, not listed
  text "Channel A" at 2422,2622 h72
  text "DGND" at 724,2577 h48 r90
  text "H" at 1170,2481 h36
  text "L" at 1270,2481 h36
  text "H" at 1630,2481 h36
  text "L" at 1730,2481 h36
  text "High side" at 3486,2478 h36
  text "DGND" at 1964,2472 h48
  text "User LED 2" at 542,2433 h36 r90
  text "User LED 1" at 399,2432 h36 r90
  text "Power LED" at 850,2371 h36 r90
  text "Digital  / Regulator" at 864.09,2160 h36
  text "3V3D" at 2136,2106 h36
  text "Reset" at 200,2030 h60
  text "SWCLK" at 2136,2006 h36
  text "Sense A" at 2448,1978 h48
  text "Low side" at 3490,1970 h36
  text "DGND" at 2136,1906 h36
  text "SWDIO" at 2136,1796 h36
  text "DGND" at 3262,1688 h48
  text "MGND" at 3562,1688 h48
  text "Sense B" at 2238,1518 h48
  text "+" at 890,1390 h60
  text "+" at 1357.72,1390 h60
  text "3V3A" at 3262,1388 h48
  text "Vbat" at 3562,1388 h48
  text "-" at 1045.91,1387.01 h60
  text "-" at 1201.81,1387.01 h60
  text "DGND" at 3262,1038 h48
  text "MGND" at 3562,1038 h48
  text "Channel B" at 2422,952 h72
  text "High side" at 3576,798 h36
  text "DGND" at 758,678 h48
  text "Low side" at 3600,300 h36
  text "Analog  / Regulator" at 864.09,130 h36
  text "Power / LED" at 1458.05,100 h36
Bottom Overlay:
  drawing of 4937 lines, arcs and shapes, not listed
  text "+" at 950.19,1390 h60
  text "+" at 1417.91,1390 h60
  text "-" at 1106.09,1387.01 h60
  text "-" at 1262,1387.01 h60
  text "Lorenzo Shaikewitz (and Julian helped)" at 2910,380 h48
Mechanical 1:
  the board outline again, w10

## Text inside footprints (layer, text, board x,y; h text height)
U2: Top Overlay "*" at 1583,2038 h50; Mechanical 13 "*" at 1605.8,1940.04 h50